# Altium PCB RelayBoard.PcbDoc
Units mm, origin at the board's own origin, x right, y up, seen from the top; angles counter-clockwise.
Board outline 120 x 120 mm, 4 copper layers (Top Layer, Internal Plane 1, Internal Plane 2, Bottom Layer), stack 0.462 mm thick; 17 components, 157 nets, 118 pads, 10 vias.
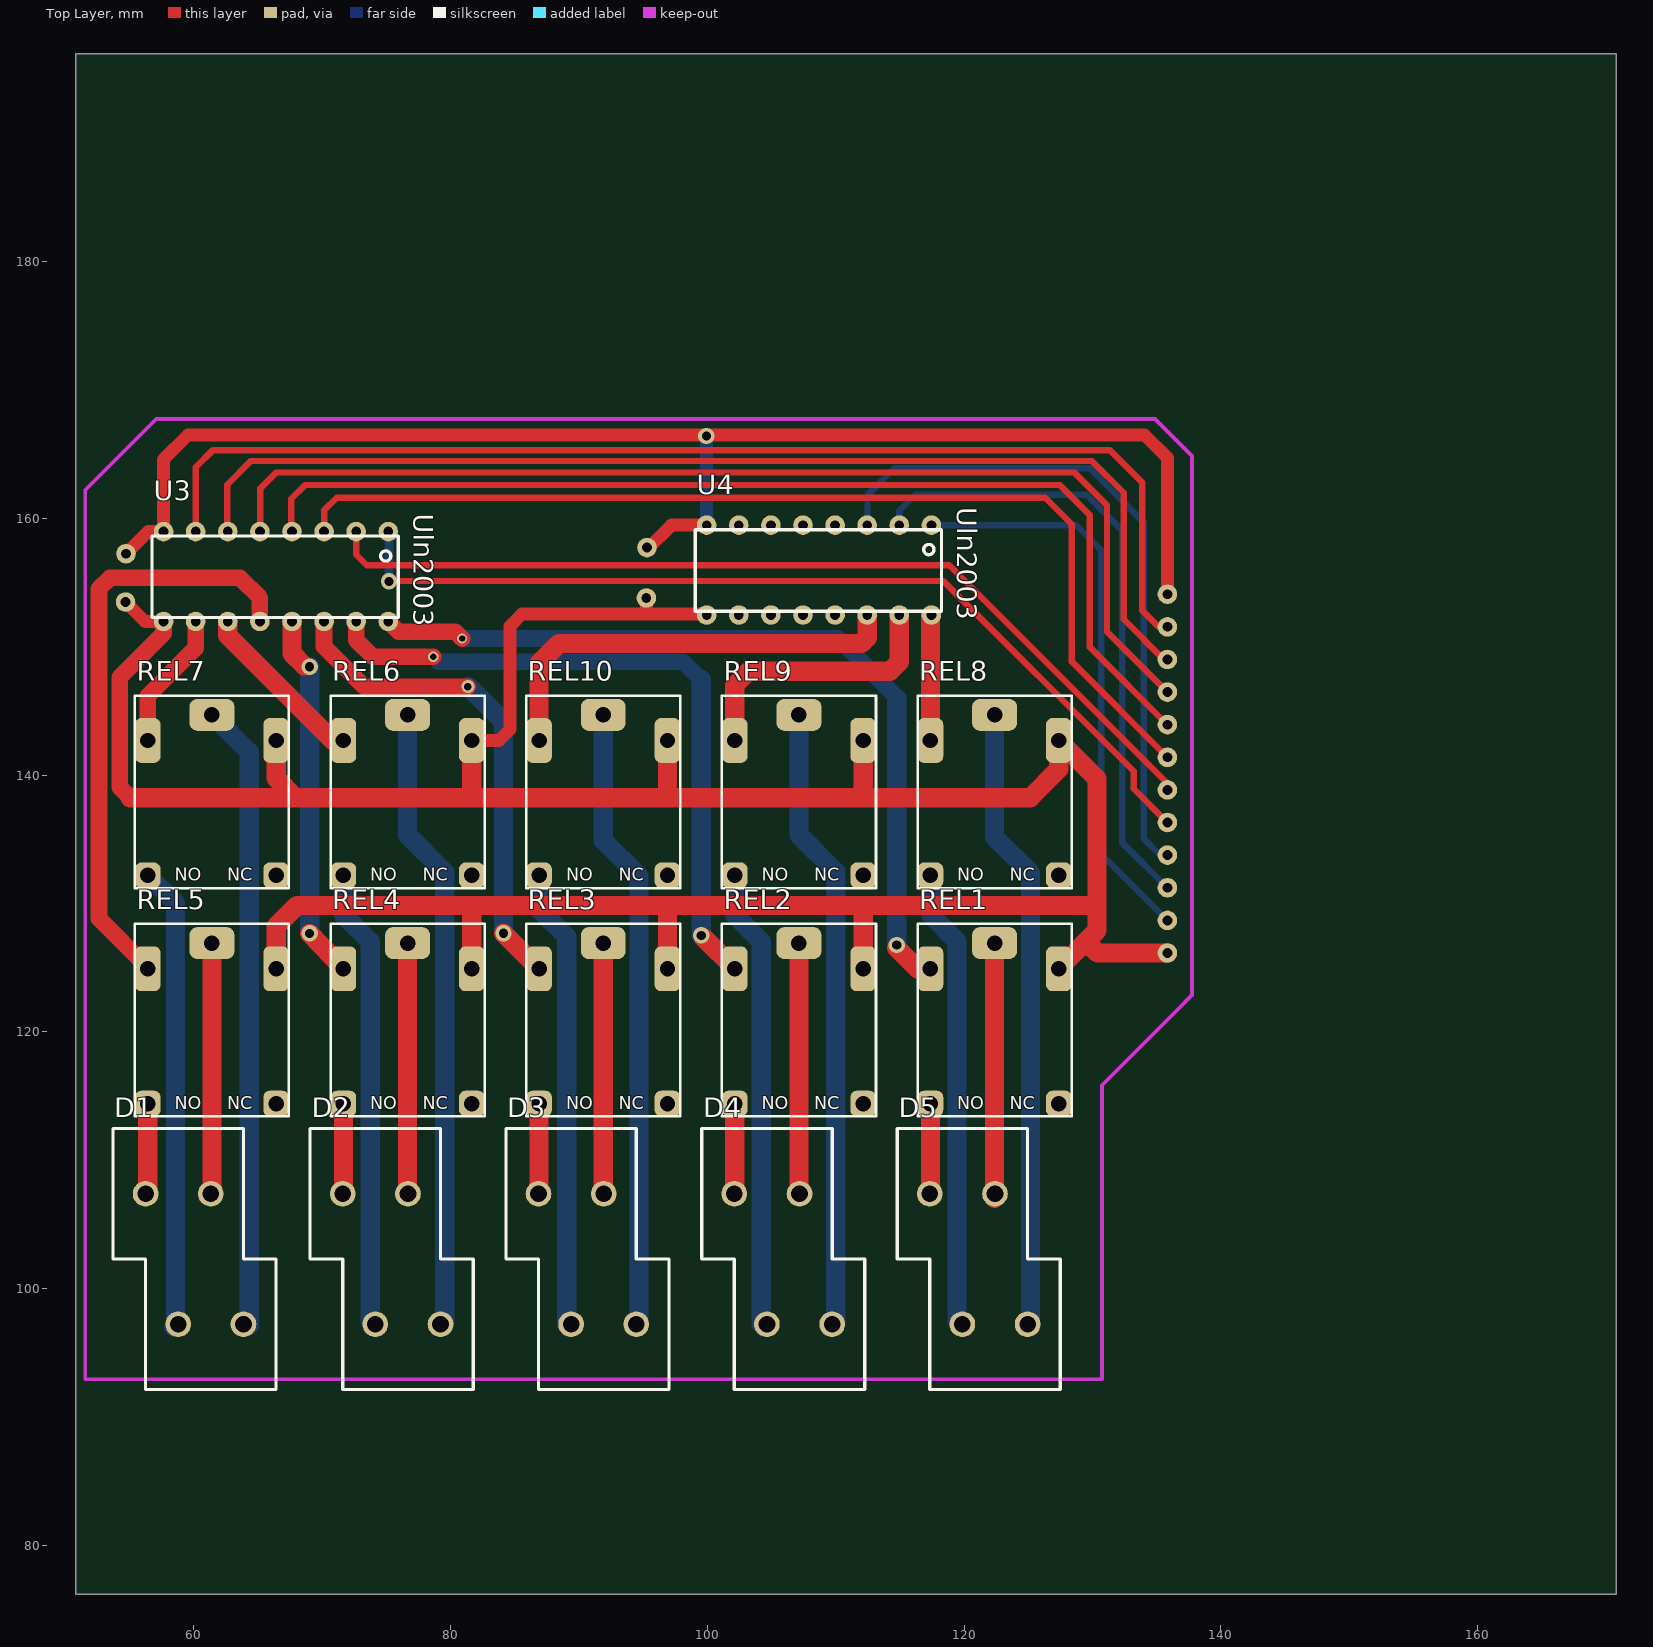
[diagram p0: Top Layer view]
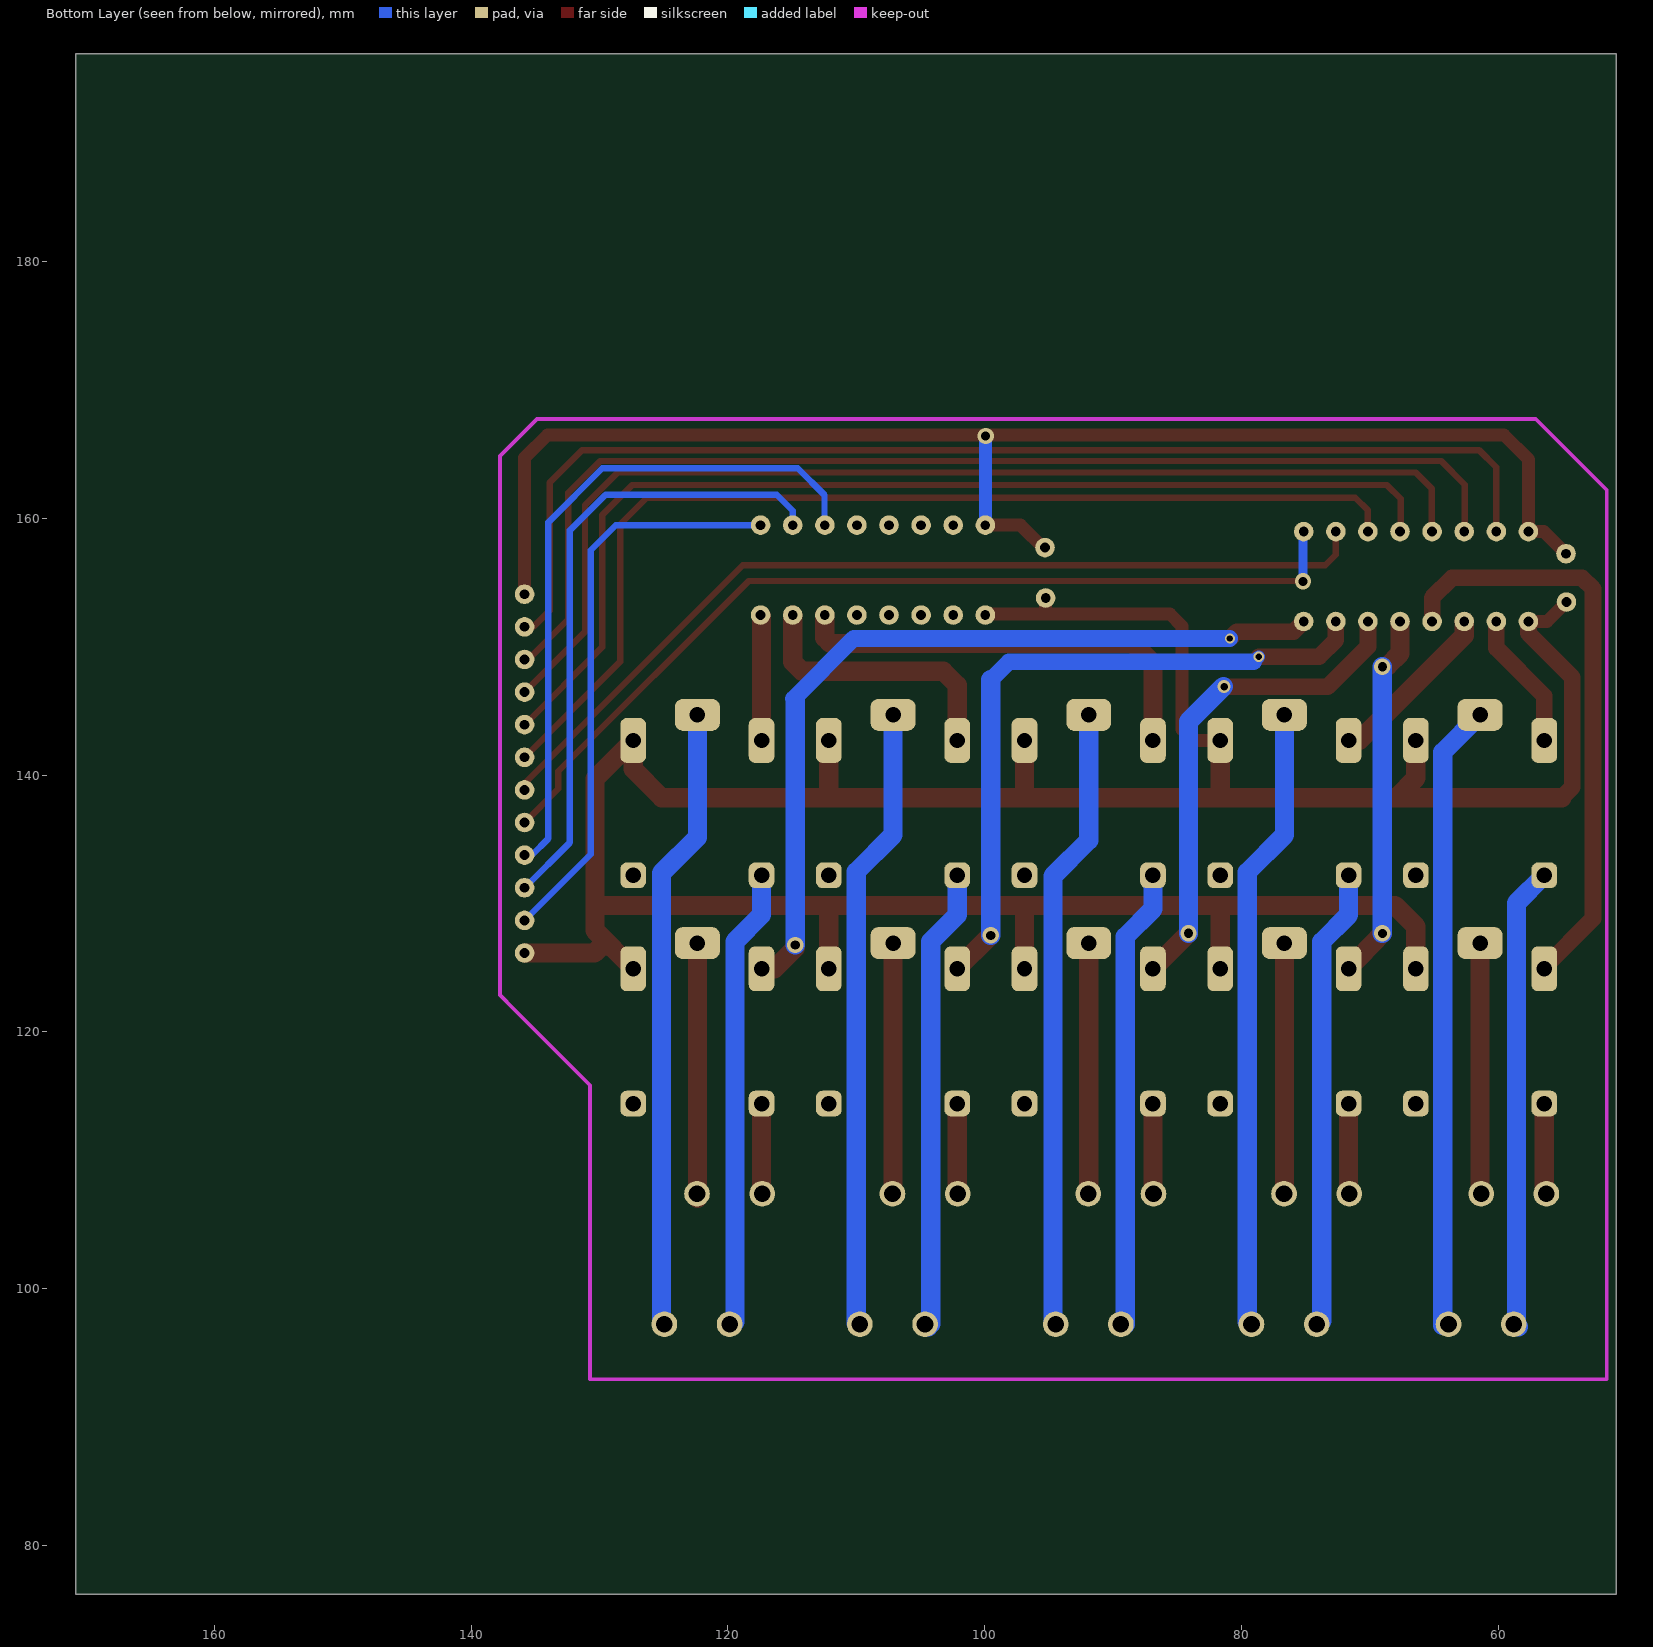
[diagram p1: Bottom Layer view, seen from below]
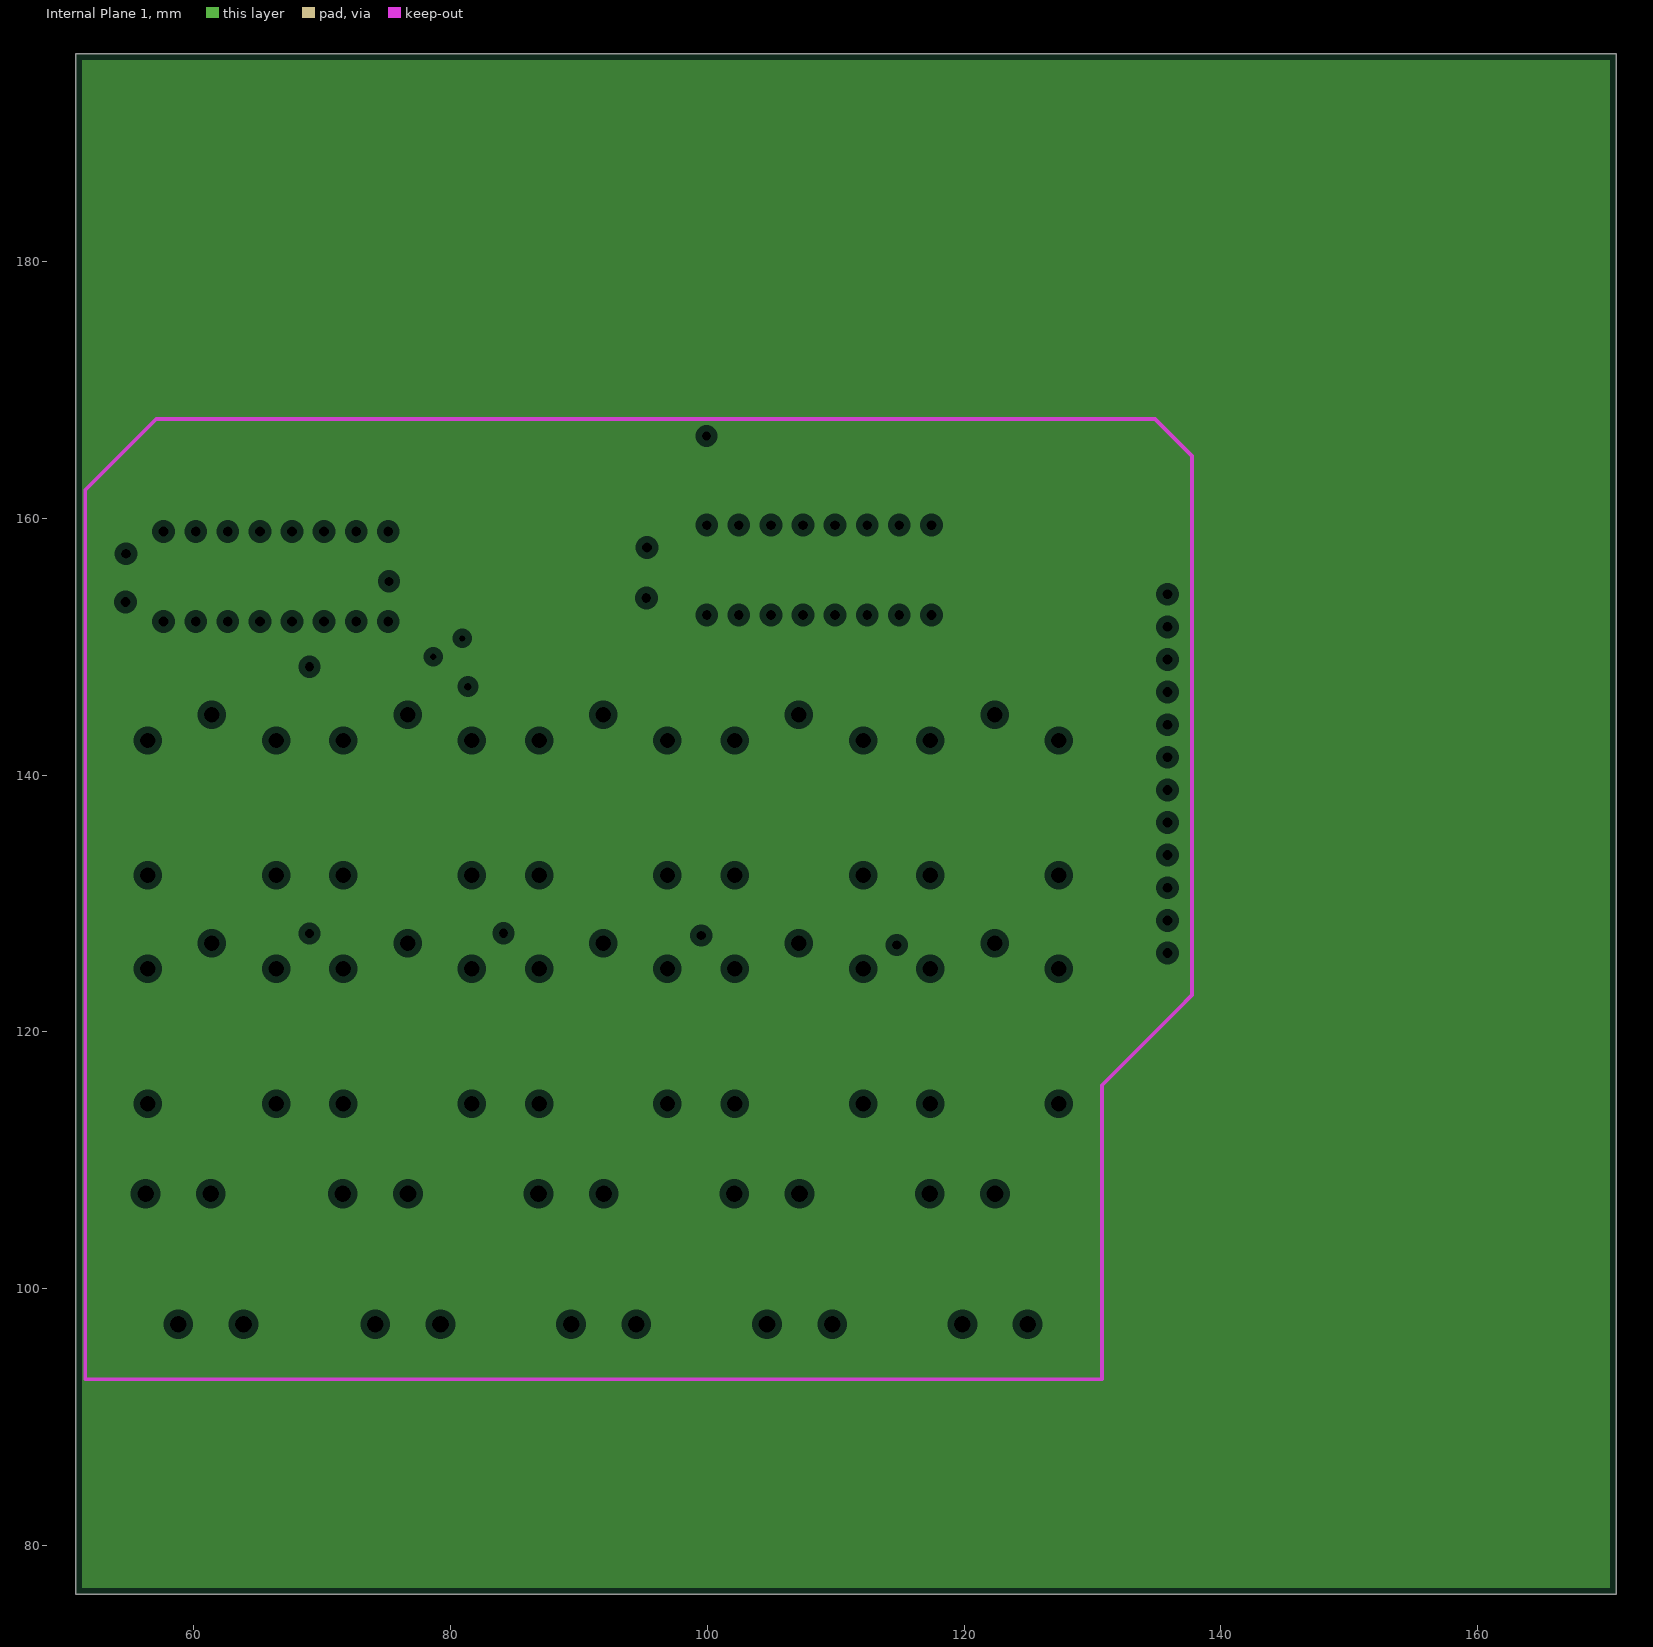
[diagram p2: Internal Plane 1, clearances drawn from the general rule]
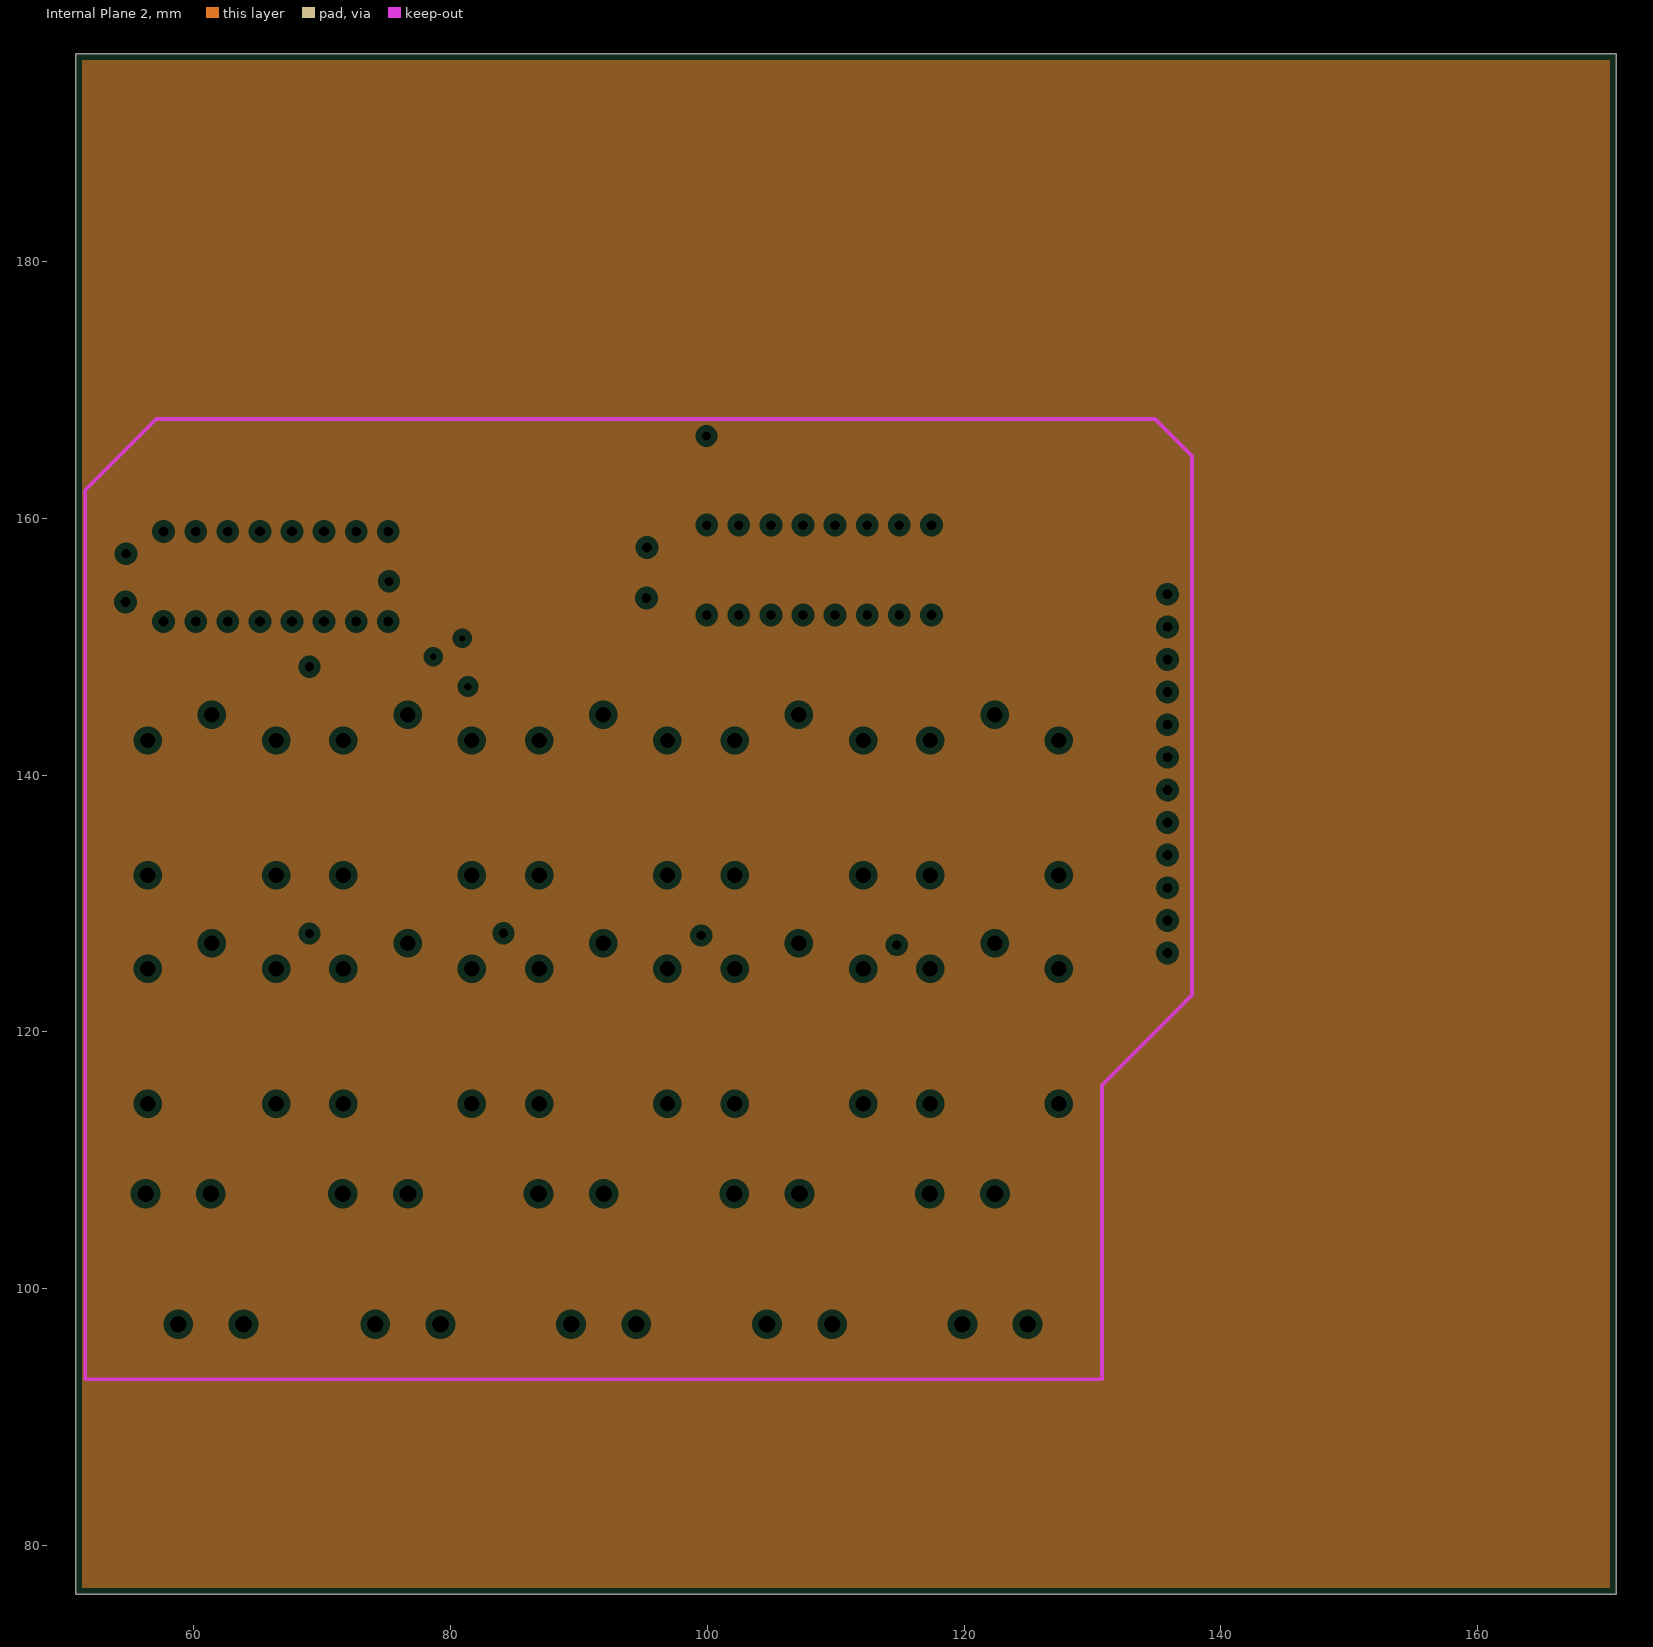
[diagram p3: Internal Plane 2, clearances drawn from the general rule]
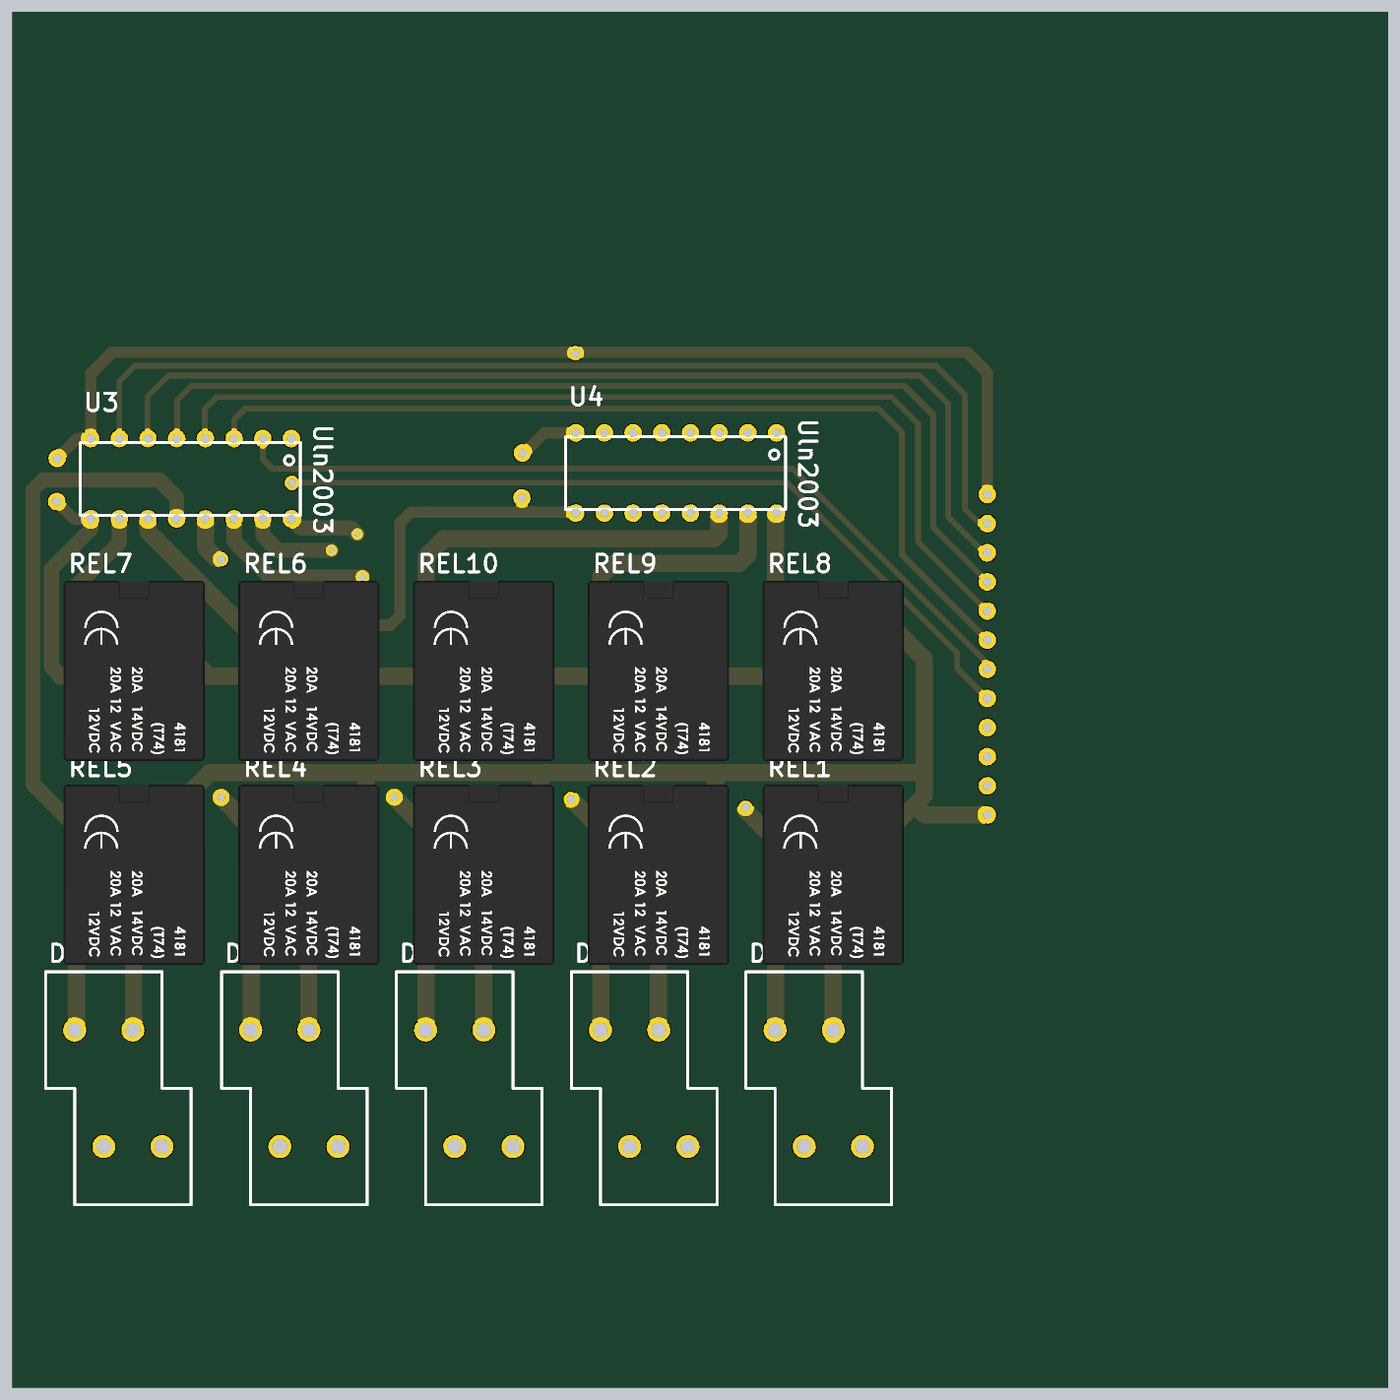
[diagram p4: 3D render of the assembled board from above, using the file's embedded part models]

## Layer stack, top to bottom
Top Solder: solder mask 0.0102, Solder Resist, Dk 3.5
Top Layer: signal copper 0.0356
Internal Plane 1: plane copper 0.0356
Internal Plane 2: plane copper 0.0356
Dielectric 1: dielectric 0.32, FR-4, Dk 4.8
Bottom Layer: signal copper 0.0356
Bottom Solder: solder mask 0.0102, Solder Resist, Dk 3.5

## Board outline
50.8,76.2 170.8,76.2 170.8,196.2 50.8,196.2

## Design rules (kind name [scope] priority, off if disabled: settings)
Clearance [All] p1: gap=0.2 ignorepadtopadclearanceinfootprint=FALSE
PlaneClearance [All] p1: clearance=0.508
PlaneConnect [All] p1: planeconnectstyle=Relief reliefexpansion=0.508 reliefentries=4 reliefconductorwidth=0.254 reliefairgap=0.254
PolygonConnect [All] p1: connectstyle=Relief reliefconductorwidth=0.254 reliefentries=4 polygonreliefangle="90 Angle" airgapwidth=0.254
RoutingVias [All] p1: holewidth=0.6 width=1 viastyle="Through Hole" minholewidth=0.711 minwidth=1.27 maxholewidth=0.711 maxwidth=1.27
SolderMaskExpansion [All] p1: expansion=0.102
Width [All] p1: maxlimit=0.2 minlimit=0.2 preferedwidth=0.2
28 further rules are at their usual default settings.

## Classes and differential pairs
component class GSM: C1 C2 R313 R323 RG1 RG2 RG3 RG33
component class MCU: Y1
component class "Reley Control": REL1 REL2 REL3 REL4 REL5 REL6 REL7 REL8 REL9 REL10 U3 U4

## Components (designator, comment, footprint, x,y, rotation, side; value= is the part's Value field where it differs from the comment)
D1 "Comment" "Conector 4 Pin" 56.25,107.4 r0 top
D2 "Comment" "Conector 4 Pin" 71.6,107.4 r0 top
D3 "Comment" "Conector 4 Pin" 86.85,107.4 r0 top
D4 "Comment" "Conector 4 Pin" 102.1,107.4 r0 top
D5 "Comment" "Conector 4 Pin" 117.325,107.4 r0 top
REL1 "12V SMALL" Relay_5_Small 122.375,120.675 r0 top
REL2 "12V SMALL" Relay_5_Small 107.135,120.675 r0 top
REL3 "12V SMALL" Relay_5_Small 91.895,120.675 r0 top
REL4 "12V SMALL" Relay_5_Small 76.655,120.675 r0 top
REL5 "12V SMALL" Relay_5_Small 61.415,120.675 r0 top
REL6 "12V SMALL" Relay_5_Small 76.655,138.455 r0 top
REL7 "12V SMALL" Relay_5_Small 61.415,138.455 r0 top
REL8 "12V SMALL" Relay_5_Small 122.375,138.455 r0 top
REL9 "12V SMALL" Relay_5_Small 107.135,138.455 r0 top
REL10 "12V SMALL" Relay_5_Small 91.895,138.455 r0 top
U3 "Uln2003" PCBComponent_1 56.75,161.075 r270 top
U4 "Uln2003" PCBComponent_1 99.05,161.575 r270 top

## Footprints (in the part's own frame and the unit in brackets; to place one, negate y for a bottom-side part, rotate by r counter-clockwise, add the part's x,y. Pads: shape width x height; smd on the part's side, far side on the other; paste and mask are expansions set on the pad)
"Conector 4 Pin" [mm]
  round 2 hole 1.3: 0(0,0) 1(5.08,0) 2(2.54,-10.16) 3(7.62,-10.16)
  silkscreen extent -2.54,-15.24 10.16,5.08
PCBComponent_1 [mil]
  round 60 hole 30: 1(82.68,724.41) 2(82.68,625.98) 3(82.68,527.56) 4(82.68,429.13) 5(82.68,330.71) 6(82.68,232.28) 7(82.68,133.86) 8(82.68,35.43) 9(358.27,35.43) 10(358.27,133.86) 11(358.27,232.28) 12(358.27,330.71) 13(358.27,429.13) 14(358.27,527.56) 15(358.27,625.98) 16(358.27,724.41)
  silkscreen extent 96,0 346,755
Relay_5_Small [mm]
  rrect50% 2x3.5 hole 1.2: 1(5,4.25) 2(-5,4.25)
  rrect50% 3.5x2.5 hole 1.2: Com(0,6.25)
  rrect50% 2x2 hole 1.2: NC(5,-6.25) NO(-5,-6.25)
  silkscreen extent -6,-7.25 6,7.75, body extent -6.13,-7.58 6.17,8.12, height 13.71

## Part data
REL1 REL2 REL3 REL4 REL5 REL6 REL7 REL8 REL9 REL10: library part HJR-78F-12VDC-S-Z, Manufacturer=TIANBO, Operating Temp="-40°C to +85°C", Rating="7A, 120VAC", Storage Temp="-40°C to +105°C", Manufacture Part #=HJR-78F-12VDC-S-Z
U3 U4: library part Component_1

## Free pads (board coordinates)
  round 1.524 hole 0.762: 0(135.83,154.095) 1(135.83,151.555) 2(135.83,149.015) 3(135.83,146.475) 4(135.83,143.935) 5(135.83,141.395) 6(135.83,138.855) 7(135.83,136.315) 8(135.83,133.775) 9(135.83,131.235) 10(135.83,128.695) 11(54.725,157.25) 11(135.83,126.155) 12(54.688,153.487) 13(95.3,157.725) 14(95.25,153.8)

## Via types
v1: diameter 1.27, hole 0.711, Top Layer to Bottom Layer, 7 vias
v2: diameter 0.8, hole 0.5, Top Layer to Bottom Layer, 2 vias
v3: diameter 1, hole 0.6, Top Layer to Bottom Layer, 1 vias

## Nets (pads, with @x,y where several pads share a name; then routed paths per layer and width w, separated by ;. In a path a pad name is that pad's centre, name@x,y a point inside that pad or via, vN(x,y) a via of type N, cw(c..) or ccw(c..) an arc to the next point about the centre after c; other vN are vias at no path point)
NetANT_1: pad.11@54.725,157.25 pad.13 U3.8 U4.8 | length 98.8
  Top Layer w1: pad.11@54.725,157.25 56.45,158.975 U3.8 57.65,164.6 59.55,166.5 134.025,166.5 ; pad.13@95.3,157.575 97.2,159.475 U4.8
  Bottom Layer w1: U4.8@99.925,159.475 v1(99.925,166.425)
NetANT_2: 
NetBT1_0: 
NetBuzzer_1: pad.12 pad.14 REL1.1 REL2.1 REL3.1 REL4.1 REL5.1 REL6.1 REL7.1 REL8.1 REL9.1 REL10.1 U3.9 U4.9 | length 242.8
  Top Layer w1: pad.12 56.2,151.975 U3.9 ; REL6.1 83.78,142.705 84.625,143.55 84.625,151.6 85.575,152.55 99.75,152.55 U4.9@99.85,152.65 ; 95.25,152.6 pad.14
  Top Layer w1.3: 55.05,138.25 54.225,139.075 54.225,147.625 57.65,151.05 U3.9
  Top Layer w1.5: 55.05,138.25 67.95,138.25 ; REL5.1 66.415,128.215 68.05,129.85 130.175,129.85 ; REL7.1 66.415,139.785 67.95,138.25 ; REL4.1 81.655,129.72 ; 81.655,138.755 REL6.1 ; REL3.1 96.895,129.745 ; 96.895,138.58 REL10.1 ; REL2.1 112.135,129.715 ; 112.135,138.265 REL9.1 ; REL1.1 130.35,127.9 130.35,139.73 REL8.1 127.375,140.475 125.15,138.25 67.95,138.25
NetBuzzer_2: U4.13
NetC1_1: 
NetC2_2: 
NetC3_1: 
NetC23_1: 
NetC_0: 
NetC_1: 
NetCon1_1: 
NetCon1_2: 
NetCon1_4: 
NetD1_1: 
NetD1_2: 
NetD2_1: 
NetD2_2: 
NetD3_1: 
NetD3_2: 
NetD4_1: 
NetD4_2: 
NetD5_1: 
NetD5_2: 
NetD6_1: 
NetD6_2: 
NetD7_1: 
NetD7_2: 
NetD8_1: 
NetD8_2: 
NetD9_1: 
NetD9_2: 
NetD10_1: 
NetD10_2: 
NetD11_1: 
NetD11_2: 
NetD12_1: 
NetD12_2: 
NetD13_1: 
NetD13_2: 
NetD14_1: 
NetD14_2: 
NetD15_1: 
NetD15_2: 
NetD16_1: 
NetD16_2: 
NetD17_1: 
NetD17_2: 
NetD18_1: 
NetD18_2: 
NetD19_1: 
NetD19_2: 
NetD20_1: 
NetD20_2: 
NetD21_1: 
NetD21_2: 
NetD22_1: 
NetD22_2: 
NetD23_1: 
NetD23_2: 
NetD24_1: 
NetD24_2: 
NetD25_1: 
NetD25_2: 
NetD26_1: 
NetD26_2: 
NetD27_1: 
NetD27_2: 
NetD28_1: 
NetD28_2: 
NetD29_1: 
NetD29_2: 
NetD30_1: 
NetD30_2: 
NetD31_1: 
NetD31_2: 
NetD32_1: 
NetD32_2: 
NetD33_2: 
NetD34_2: 
NetLCD_0: 
NetLCD_1: 
NetLCD_2: 
NetLCD_3: 
NetLCD_4: 
NetLCD_5: 
NetLCD_10: 
NetLCD_11: 
NetLCD_12: 
NetLCD_13: 
NetLCD_15: 
NetLED1_1: 
NetLED1_2: 
NetLED2_1: 
NetM1_1: 
NetM1_2: 
NetM1_3: 
NetM1_4: 
NetM1_5: 
NetM1_6: 
NetM1_7: 
NetM1_8: 
NetM1_15: 
NetM1_16: 
NetM1_17: 
NetM1_18: 
NetM1_19: 
NetM1_20: 
NetM1_21: 
NetM1_22: 
NetM2_1: 
NetM2_2: 
NetM2_3: 
NetM2_4: 
NetM2_5: 
NetM2_6: 
NetM2_7: 
NetM2_8: 
NetM2_15: 
NetM2_16: 
NetM2_17: 
NetM2_18: 
NetM2_19: 
NetM2_20: 
NetM2_21: 
NetM2_22: 
NetQ1_B: 
NetQ1_C: 
NetQL1_B: 
NetREL1_2: REL1.2 U3.16 | length 65
  Top Layer w0.2: REL1.2@116.375,124.925 REL1.2
  Top Layer w1: v1@114.75,126.55 v1(114.75,126.775)
  Top Layer w1.3: U3.16 75.95,151.175 80.375,151.175 v2(80.9,150.65)
  Top Layer w1.5: v1@114.75,126.55 REL1.2@116.375,124.925
  Bottom Layer w1: 114.75,145.8 114.9,145.95
  Bottom Layer w1.3: v2(80.9,150.65) 110.2,150.65 114.9,145.95
  Bottom Layer w1.5: v1(114.75,126.775) 114.75,145.8
NetREL2_2: REL2.2 U3.15 | length 53.5
  Top Layer w1: v1(99.525,127.525) 99.525,127.215 99.55,127.19 v1@99.71,127.35
  Top Layer w1.3: U3.15 72.65,150.525 73.95,149.225 v2(78.65,149.225)
  Top Layer w1.5: v1@99.71,127.35 REL2.2
  Bottom Layer w1: v2(78.65,149.225) 79.05,148.825
  Bottom Layer w1.3: 79.05,148.825 98.125,148.825 99.525,147.425
  Bottom Layer w1.5: v1(99.525,127.525) 99.525,147.425
NetREL3_2: REL3.2 U3.14 | length 38.7
  Top Layer w1.3: U3.14 70.15,150.025 73.275,146.9 v3(81.35,146.9)
  Top Layer w1.5: v1(84.125,127.695) REL3.2
  Bottom Layer w1: v3(81.35,146.9) v3@81.4,146.9
  Bottom Layer w1.5: v3@81.4,146.9 84.125,144.175 v1(84.125,127.695)
NetREL4_2: REL4.2 U3.13 | length 28.9
  Top Layer w0.2: v1@68.6,148.525 v1(69.025,148.45)
  Top Layer w1.5: U3.13 67.65,149.475 v1@68.6,148.525 ; v1(69.025,127.68) REL4.2
  Bottom Layer w1.5: v1(69.025,127.68) v1(69.025,148.45)
NetREL5_2: REL5.2 U3.12 | length 46.5
  Top Layer w0.2: REL5.2 REL5.2@56.415,125.035
  Top Layer w1.3: REL5.2@56.415,125.035 52.625,128.825 52.625,154.525 53.475,155.375 63.6,155.375 65.15,153.825 U3.12
NetREL6_2: REL6.2 U3.11 | length 13.5
  Top Layer w1.5: U3.11 62.65,150.875 70.82,142.705 REL6.2
NetREL7_2: REL7.2 U3.10 | length 10.8
  Top Layer w1.3: REL7.2 56.415,146.165 60.15,149.9 U3.10
NetREL8_2: REL8.2 U4.16 | length 9.7
  Top Layer w1.5: REL8.2 U4.16@117.375,152.4
NetREL9_2: REL9.2 U4.15 | length 21.5
  Top Layer w1.5: REL9.2 102.135,147.01 103.225,148.1 114.225,148.1 114.95,148.825 U4.15
NetREL10_2: REL10.2 U4.14 | length 34.2
  Top Layer w1.5: REL10.2 86.895,148.695 88.45,150.25 112,150.25 112.45,150.7 U4.14
NetRG2_1: 
NetRG3_2: 
NetS1_0: 
NetS1_1: 
NetU1_4: 
NetU1_19: U4.4
NetU1_23: 
NetU1_24: 
NetU1_25: U4.1
NetU1_26: U3.7
NetU1_27: U3.6
NetU1_28: U3.5
NetU1_29: U3.4
NetU1_30: U3.3
NetU1_31: U3.2
NetU1_32: U3.1
NetU1_33: U4.3
NetU1_34: U4.2
pads on no net: D1.0 D1.1 D1.2 D1.3 D2.0 D2.1 D2.2 D2.3 D3.0 D3.1 D3.2 D3.3 D4.0 D4.1 D4.2 D4.3 D5.0 D5.1 D5.2 D5.3 REL1.Com REL1.NC REL1.NO REL2.Com REL2.NC REL2.NO REL3.Com REL3.NC REL3.NO REL4.Com REL4.NC REL4.NO REL5.Com REL5.NC REL5.NO REL6.Com REL6.NC REL6.NO REL7.Com REL7.NC REL7.NO REL8.Com REL8.NC REL8.NO REL9.Com REL9.NC REL9.NO REL10.Com REL10.NC REL10.NO U4.5 U4.6 U4.7 U4.10 U4.11 U4.12
copper on no net: | length 1308.6
  Top Layer w0.2: 135.145,151.555 135.83,151.555 ; 135.56,149.015 135.83,149.015
  Top Layer w0.5: 60.15,158.975 60.15,163.975 61.5,165.325 131.35,165.325 133.875,162.8 133.875,152.825 135.145,151.555 ; 62.6,158.975 62.6,162.625 64.45,164.475 129.95,164.475 132.425,162 132.425,152.15 135.56,149.015 ; 65.181,158.975 65.181,162.331 66.425,163.575 128.575,163.575 131.125,161.025 131.125,151.18 135.83,146.475 ; 67.6,158.975 67.6,161.525 68.675,162.6 127.45,162.6 129.8,160.25 129.8,149.965 135.83,143.935 ; 70.15,158.775 70.15,160.625 71.125,161.6 126.325,161.6 128.375,159.55 128.375,148.85 135.83,141.395 ; 72.65,158.975 72.65,157.175 73.475,156.35 118.85,156.35 124.45,150.75 135.83,139.37 135.83,138.855 ; v1@74.85,155.125 118.375,155.125 133.2,140.3 133.2,138.945 135.83,136.315
  Top Layer w1: 134.05,166.5 135.83,164.72 135.83,154.095
  Top Layer w1.5: 56.415,107.4 56.415,114.425 ; 61.415,107.4 61.415,126.925 ; 71.655,107.375 71.655,114.425 ; 76.655,107.4 76.655,126.925 ; 86.895,107.4 86.895,114.425 ; 91.895,107.4 91.895,126.925 ; 102.135,107.425 102.135,114.425 ; 107.135,107.225 107.135,126.925 ; 117.375,107.425 117.375,114.425 ; 122.375,107.025 122.375,126.925 ; 129.54,127 130.385,126.155 135.83,126.155
  Bottom Layer w0.2: 135.275,133.775 135.83,133.775
  Bottom Layer w0.5: 112.475,159.225 112.475,161.825 114.55,163.9 129.775,163.9 133.975,159.7 133.975,135.075 135.275,133.775 ; 114.95,159.475 114.95,160.6 116.2,161.85 129.525,161.85 132.3,159.075 132.3,134.765 135.83,131.235 ; 117.45,159.475 128.725,159.475 130.675,157.525 130.675,133.85 135.83,128.695
  Bottom Layer w0.7: v1(75.2,155.1) 75.2,158.975
  Bottom Layer w1: 124.85,97.24 125.175,97.565
  Bottom Layer w1.5: 56.415,132.205 58.575,130.045 58.575,97.2 58.425,97.05 ; 61.415,144.705 64.325,141.795 64.325,97.15 ; 71.655,132.205 71.655,129.12 73.75,127.025 73.75,97.49 74,97.24 ; 76.655,144.705 76.655,135.345 79.55,132.45 79.55,97.415 79.375,97.24 ; 86.895,132.205 86.895,129.58 89.05,127.425 89.05,97.24 ; 91.895,144.705 91.895,134.93 94.675,132.15 94.675,97.24 ; 102.135,132.205 102.135,129.115 104.2,127.05 104.2,97.25 104.4,97.05 ; 107.135,144.705 107.135,135.34 110,132.475 110,97.3 109.85,97.15 ; 117.375,132.205 117.375,129.125 119.45,127.05 119.45,97.44 119.65,97.24 ; 122.375,144.705 122.375,135.175 125.175,132.375 125.175,97.565

## Keep-outs
Keep-Out Layer:
  lines w0.3: 51.55,92.95 51.55,153.55 51.55,162.225 57.075,167.75 58.975,167.75 134.875,167.75 137.75,164.875 137.75,122.875 136.6,121.725 130.725,115.85 130.725,92.95 51.55,92.95

## Text inside footprints (layer, text, board x,y; h text height)
REL1: Top Overlay "NC" at 123.569,113.995 h1; Top Overlay "NO" at 119.479,113.995 h1
REL2: Top Overlay "NC" at 108.329,113.995 h1; Top Overlay "NO" at 104.239,113.995 h1
REL3: Top Overlay "NC" at 93.089,113.995 h1; Top Overlay "NO" at 88.999,113.995 h1
REL4: Top Overlay "NC" at 77.849,113.995 h1; Top Overlay "NO" at 73.759,113.995 h1
REL5: Top Overlay "NC" at 62.609,113.995 h1; Top Overlay "NO" at 58.519,113.995 h1
REL6: Top Overlay "NC" at 77.849,131.775 h1; Top Overlay "NO" at 73.759,131.775 h1
REL7: Top Overlay "NC" at 62.609,131.775 h1; Top Overlay "NO" at 58.519,131.775 h1
REL8: Top Overlay "NC" at 123.569,131.775 h1; Top Overlay "NO" at 119.479,131.775 h1
REL9: Top Overlay "NC" at 108.329,131.775 h1; Top Overlay "NO" at 104.239,131.775 h1
REL10: Top Overlay "NC" at 93.089,131.775 h1; Top Overlay "NO" at 88.999,131.775 h1